# Altium PCB girassol3.PcbDoc
Units mil, origin at the board's own origin, x right, y up, seen from the top; angles counter-clockwise.
Board outline 3400 x 2150 mil, 2 copper layers (Top Layer, Bottom Layer); 43 components, 35 nets, 220 pads, 30 vias.
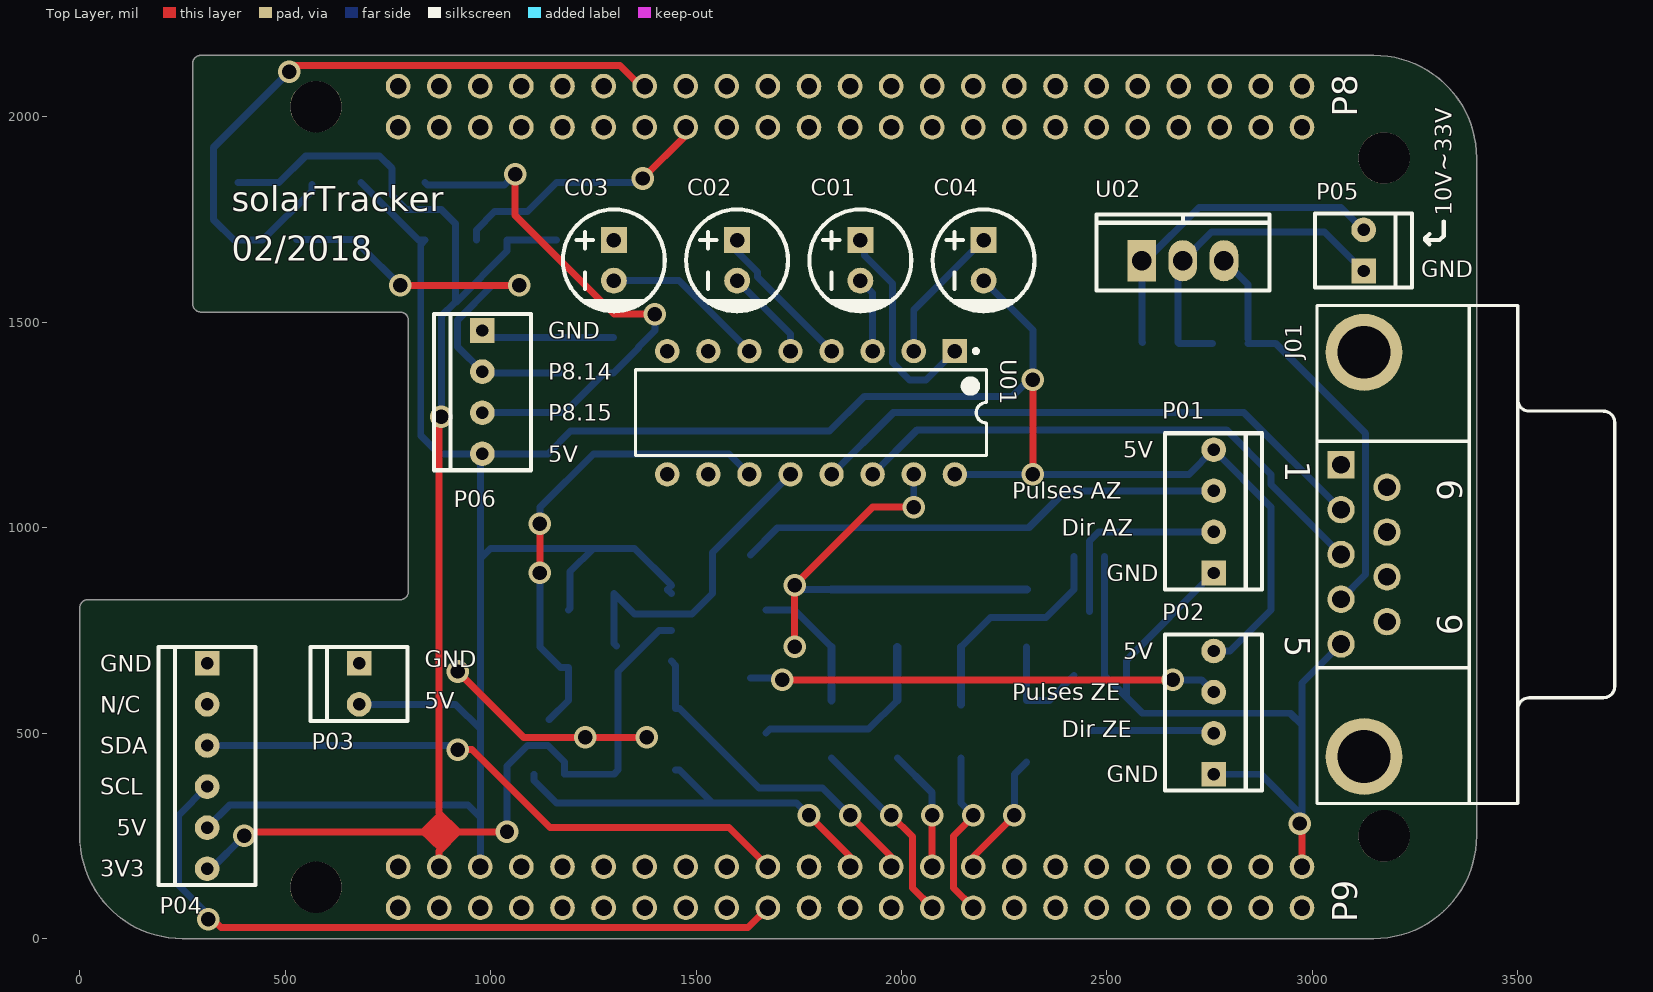
[diagram p0: Top Layer view]
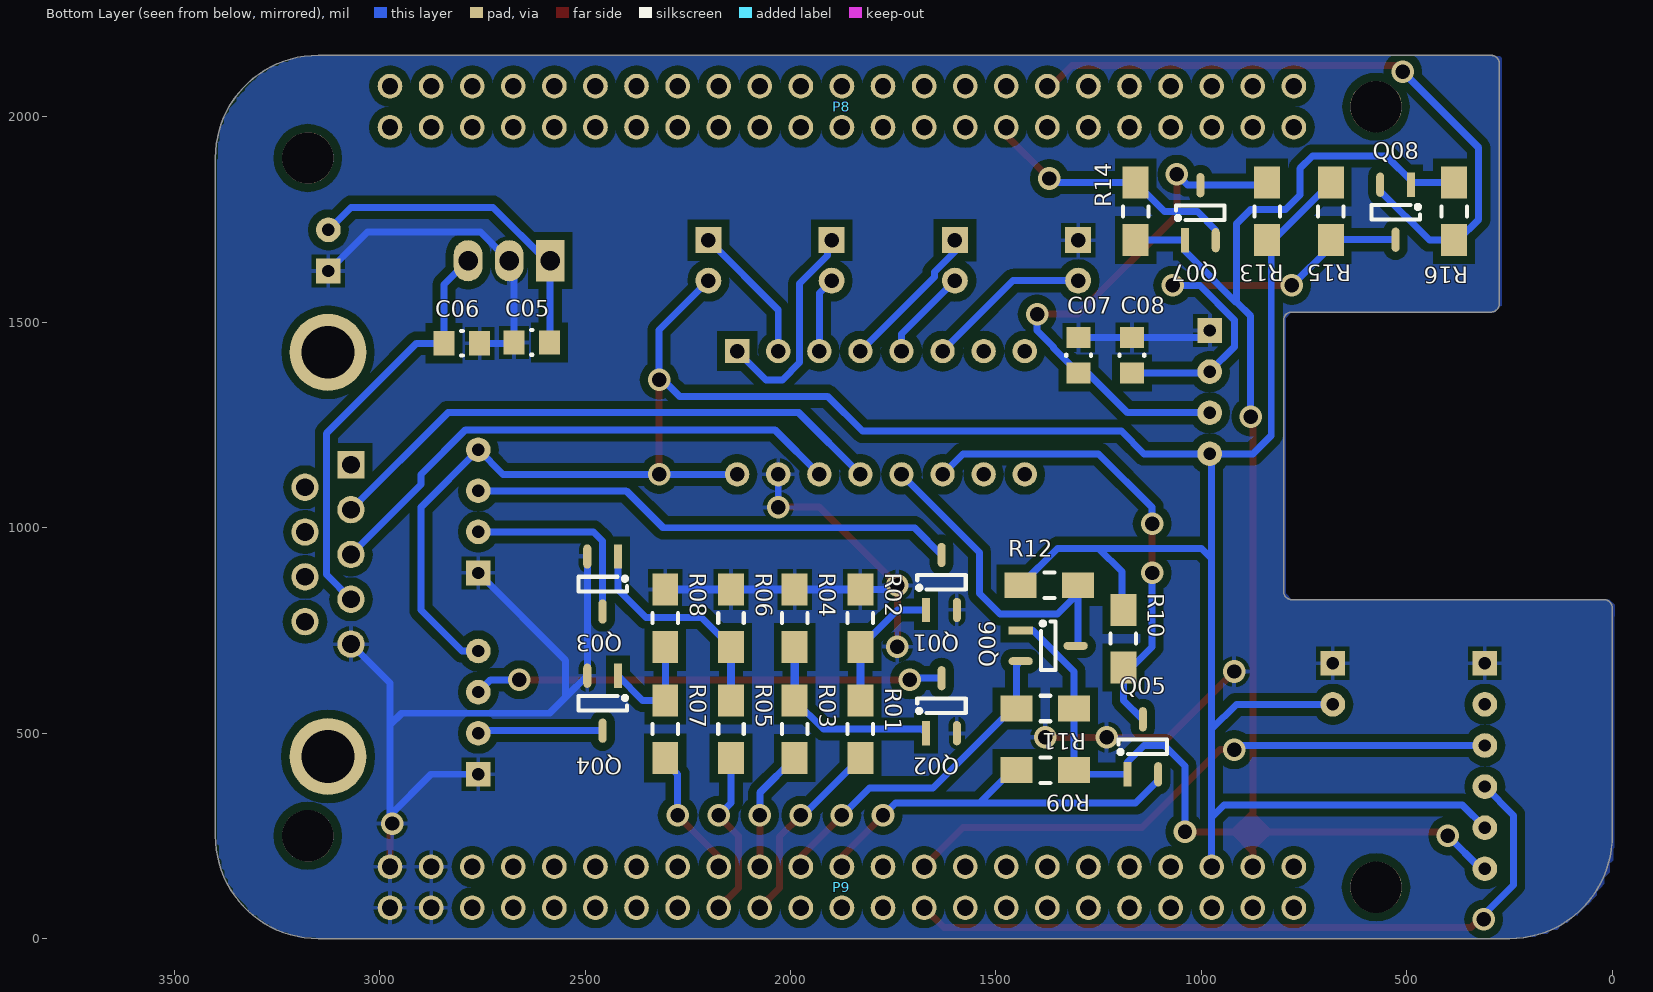
[diagram p1: Bottom Layer view, seen from below]

## Layer stack, top to bottom
Top Solder: solder mask 0.4, Solder Resist, Dk 3.5
Top Layer: signal copper 1.4
Dielectric1: dielectric 12.6, FR-4, Dk 4.8
Bottom Layer: signal copper 1.4
Bottom Solder: solder mask 0.4, Solder Resist, Dk 3.5

## Board outline
0,250 0,805 cw(c20,805) 20,825 780,825 ccw(c780,845) 800,845 800,1505 ccw(c780,1505) 780,1525 295,1525 cw(c295,1545) 275,1545 275,2130 cw(c295,2130) 295,2150 3150,2150 cw(c3150,1900) 3400,1900 3400,250 cw(c3150,250) 3150,0 250,0 cw(c250,250)

## Design rules (kind name [scope] priority, off if disabled: settings)
Clearance [All] p1: gap=10 ignorepadtopadclearanceinfootprint=FALSE except(0: Arc-Hole Track-Hole SMDPad-Hole THPad-Hole Via-Hole Fill-Hole Poly-Hole Region-Hole Text-Hole)
PolygonConnect [All] p1: connectstyle=Relief reliefconductorwidth=10 reliefentries=4 polygonreliefangle="90 Angle" airgapwidth=10
RoutingVias [All] p1: holewidth=28 width=50 viastyle="Through Hole" minholewidth=28 minwidth=50 maxholewidth=28 maxwidth=50
SolderMaskExpansion [All] p1: expansion=4
Width [All] p1: maxlimit=20 minlimit=15 preferedwidth=17
30 further rules are at their usual default settings.

## Components (designator, comment, footprint, x,y, rotation, side; value= is the part's Value field where it differs from the comment)
C01 "1uF" CP-RAD-6.3mm-15.0mm-2.5mm 1900,1700 r270 top
C02 "1uF" CP-RAD-6.3mm-15.0mm-2.5mm 1600,1700 r270 top
C03 "1uF" CP-RAD-6.3mm-15.0mm-2.5mm 1300,1700 r270 top
C04 "1uF" CP-RAD-6.3mm-15.0mm-2.5mm 2200,1700 r270 top
C05 "100nF" 0805SMD 2630,1450 r180 bottom
C06 "100nF" 0805SMD 2800,1450 r0 bottom
C07 "Cap" 0805SMD 1300,1420 r270 bottom
C08 "Cap" 0805SMD 1170,1420 r270 bottom
J01 "D Connector 9" DSUB1.385-2H9 3500,935 r270 top
P01 "Molex_kk-4" Molex_kk-4 2760,1090 r90 top
P02 "Molex_kk-4" Molex_kk-4 2760,600 r90 top
P03 "Molex_kk-2" Molex_kk-2 680,470 r270 top
P04 "Molex_kk-6" Molex_kk-6 310,470 r270 top
P05 "Molex_kk-2" Molex_kk-2 3125,1825 r90 top
P06 "Molex_kk-4" Molex_kk-4 980,1280 r270 top
P8 "BBB_P8" BBB_CAPE_HEADER 775,1975 r180 bottom locked
P9 "BBB_P9" BBB_CAPE_HEADER 775,75 r180 bottom locked
Q01 "2N7002" SOT-23/3 1670,800 r180 bottom
Q02 "2N7002" SOT-23/3 1670,500 r180 bottom
Q03 "2N7002" SOT-23/3 2420,930 r0 bottom
Q04 "2N7002" SOT-23/3 2420,640 r0 bottom
Q05 "2N7002" SOT-23/3 1180,400 r180 bottom
Q06 "2N7002" SOT-23/3 1440,750 r270 bottom
Q07 "2N7002" SOT-23/3 1040,1700 r180 bottom
Q08 "2N7002" SOT-23/3 490,1835 r0 bottom
R01 "10k" 1206SMD 1830,480 r90 bottom
R02 "10k" 1206SMD 1830,750 r90 bottom
R03 "10k" 1206SMD 1990,480 r90 bottom
R04 "10k" 1206SMD 1990,750 r90 bottom
R05 "10k" 1206SMD 2145,480 r90 bottom
R06 "10k" 1206SMD 2145,750 r90 bottom
R07 "10k" 1206SMD 2305,480 r90 bottom
R08 "10k" 1206SMD 2305,750 r90 bottom
R09 "10k" 1206SMD 1410,410 r180 bottom
R10 "10k" 1206SMD 1190,700 r90 bottom
R11 "10k" 1206SMD 1410,560 r180 bottom
R12 "10k" 1206SMD 1340,860 r0 bottom
R13 "10k" 1206SMD 840,1800 r270 bottom
R14 "10k" 1206SMD 1160,1800 r270 bottom
R15 "10k" 1206SMD 685,1740 r90 bottom
R16 "10k" 1206SMD 385,1740 r90 bottom
U01 "MAX232AEJE" JE16 1780,1280 r270 top
U02 "LM7815CT" TO-220/123 2585,1650 r0 top

## Footprints (in the part's own frame and the unit in brackets; to place one, negate y for a bottom-side part, rotate by r counter-clockwise, add the part's x,y. Pads: shape width x height; smd on the part's side, far side on the other; paste and mask are expansions set on the pad)
0805SMD [mm]
  rect 1.3x1.5 smd: 1(-1.1,0.025) 2(1.1,0.025)
  silkscreen extent -0.05,-0.74 0.05,0.79
1206SMD [mil]
  rect 78x63 smd: 1(-40,0) 2(100,0)
  silkscreen extent 18,-31 42,31
BBB_CAPE_HEADER [mil] "46-pin male header for BeagleBone Black P8,P9"
  round 60 hole 40: 1(0,0) 2(0,100) 3(-100,0) 4(-100,100) 5(-200,0) 6(-200,100) 7(-300,0) 8(-300,100) 9(-400,0) 10(-400,100) 11(-500,0) 12(-500,100) 13(-600,0) 14(-600,100) 15(-700,0) 16(-700,100) 17(-800,0) 18(-800,100) 19(-900,0) 20(-900,100) 21(-1000,0) 22(-1000,100) 23(-1100,0) 24(-1100,100) 25(-1200,0) 26(-1200,100) 27(-1300,0) 28(-1300,100) 29(-1400,0) 30(-1400,100) 31(-1500,0) 32(-1500,100) 33(-1600,0) 34(-1600,100) 35(-1700,0) 36(-1700,100) 37(-1800,0) 38(-1800,100) 39(-1900,0) 40(-1900,100) 41(-2000,0) 42(-2000,100) 43(-2100,0) 44(-2100,100) 45(-2200,0) 46(-2200,100)
  body extent -2246,-42 46,142, height 408
CP-RAD-6.3mm-15.0mm-2.5mm [mm] "Radial Capacitor; D 6.3mm; L 15.0mm; P 2.5mm"
  rect 1.6x1.6 hole 0.9: 1(0,0)
  round 1.6 hole 0.9: 2(2.5,0)
  silkscreen extent -1.9,-3.15 4.4,3.15
DSUB1.385-2H9 [mm] "Connector; D Subminiature; 9 Position; Right Angle; Pitch 1.385 mm"
  rect 1.69x1.69 hole 1.09: 1(-5.54,-10.92)
  round 1.69 hole 1.09: 2(-2.77,-10.92) 3(0,-10.92) 4(2.77,-10.92) 5(5.54,-10.92) 6(-4.155,-8.08) 7(-1.385,-8.08) 8(1.385,-8.08) 9(4.155,-8.08)
  round 4.76 hole 3.26: 10(-12.495,-9.5) 11(12.495,-9.5)
  silkscreen extent -15.4,-12.4 15.4,6
JE16 [mm] "DIP, 16-Leads, Row Spacing 7.62mm, Pitch 2.54mm, Body 20.37x6.73mm"
  rect 1.5x1.5 hole 0.9: 1(-3.81,8.89)
  round 1.5 hole 0.9: 2(-3.81,6.35) 3(-3.81,3.81) 4(-3.81,1.27) 5(-3.81,-1.27) 6(-3.81,-3.81) 7(-3.81,-6.35) 8(-3.81,-8.89) 9(3.81,-8.89) 10(3.81,-6.35) 11(3.81,-3.81) 12(3.81,-1.27) 13(3.81,1.27) 14(3.81,3.81) 15(3.81,6.35) 16(3.81,8.89)
  silkscreen extent -3.93,-10.85 2.65,10.85, body extent -3.6,-10.82 3.6,10.82, height 5.08
Molex_kk-2 [mil]
  rect 60x60 hole 30: 1(-200,0)
  round 60 hole 30: 2(-100,0)
  silkscreen extent -240,-118 -60,118
Molex_kk-4 [mil]
  rect 60x60 hole 30: 1(-200,0)
  round 60 hole 30: 2(-100,0) 3(0,0) 4(100,0)
  silkscreen extent -240,-118 140,118
Molex_kk-6 [mil]
  rect 60x60 hole 30: 1(-200,0)
  round 60 hole 30: 2(-100,0) 3(0,0) 4(100,0) 5(200,0) 6(300,0)
  silkscreen extent -240,-118 340,118
SOT-23/3 [mm] "Small Outline Transistor 3 leads"
  rect 0.5x1.5 smd: 1(0,0)
  oval 0.5x1.5 smd: 2(1.9,0) 3(0.95,3.4)
  silkscreen extent -0.56,1.25 2.45,2.16, body extent -0.56,0.5 2.44,3, height 1.08
TO-220/123 [mil] "TO, Thru-Hole, Vertical, Heatsink Mounted; 3 In-Line Leads; Pitch 2.54 mm"
  rect 70x100 hole 47.24: 1(0,0)
  oval 70x100 hole 47.24: 2(100,0) 3(200,0)
  silkscreen extent -111,-73 311,112, body extent -121,-59 321,126, height 832

## Part data
C01 C02 C03 C04: library part Capacitor-Electrolytic, "Electrolytic Capacitor"
C05 C06 C07 C08: library part Capacitor
J01: "Receptacle Assembly, 9 Position, Right Angle"
R01 R02 R03 R04 R05 R06 R07 R08 R09 R10 R11 R12 R13 R14 R15 R16: library part Resistor, "Resistor"
U01: "+5V Powered, Multi-Channel RS-232 Driver/Receiver"
U02: "Positive 15 V Regulator"

## Free pads (board coordinates)
  round 125 hole 125 unplated: NPTH(575,125) NPTH(575,2025) NPTH(3175,250) NPTH(3175,1900)

## Via types
v1: diameter 55, hole 35, Top Layer to Bottom Layer, 30 vias

## Nets (pads, with @x,y where several pads share a name; then routed paths per layer and width w, separated by ;. In a path a pad name is that pad's centre, name@x,y a point inside that pad or via, vN(x,y) a via of type N, cw(c..) or ccw(c..) an arc to the next point about the centre after c; other vN are vias at no path point)
3V3: P04.6 P9.4 Q05.1 Q06.1 Q07.1 Q08.1 R09.2 R11.2 R14.2 R16.2 | length 4286.6
  Top Layer w17: v1(400,250) 410,260 920,260 ; P9.4 875,213 921,259 920,260 ; v1(880,1270) 874,1264 874,306 920,260 ; v1(1040,260) 920,260
  Bottom Layer w17: P04.6 320,170 v1(400,250) ; R16.2 485,1840 550,1905 730,1905 760,1875 760,1810 795,1775 880,1775 915,1740 915,1550 ; v1(880,1270) 880,1515 915,1550 ; v1(1040,260) 1040,420 1090,470 1140,470 1180,430 Q05.1 1300,400 R09.2 R11.2 1310,650 1410,750 Q06.1 ; R14.2 Q07.1 1040,1673.48 916.52,1550 915,1550
5V: C04.2 P01.4 P02.4 P03.2 P04.5 P06.4 P9.6 R10.2 R12.2 R13.2 R15.2 U01.16 | length 6799.6
  Top Layer w17: v1(2320,1130) v1(2320,1360)
  Bottom Layer w17: P04.5 365,325 945,325 975,295 ; P03.2 915,570 975,510 ; R15.2 825,1700 R13.2 830,1690 830,1225 875,1180 P06.4 ; P9.6 975,295 ; R10.2 1193.5,803.5 1193.5,893.5 1250,950 ; R12.2@1430,850 R12.2@1440,840 ; R12.2 1350,950 1250,950 ; U01.16 v1(2320,1130) 2700,1130 P01.4 2900,1050 2900,800 2800,700 P02.4 ; C04.2 2320,1481.57 v1(2320,1360) ; v1@2310,1360 2270,1320 1910,1320 1825,1235 1195,1235 1140,1180 P06.4 ; 975,295 975,510 ; 975,510 975,925 ; 975,925 975,1175 P06.4 ; 975,925 1000,950 1250,950
10V-33V: C05.2 P05.2 U02.1 | length 816.3
  Bottom Layer w17: C05.2 2585,1452.69 U02.1 2594.34,1650 2724.34,1780 3070,1780 P05.2
15V: C06.2 J01.4 U02.3 | length 1021.4
  Bottom Layer w17: U02.3 2843.31,1591.69 C06.2@2843.31,1459 ; C06.2 2911,1449 3130,1230 3130,885.87 J01.4
GND: C03.1 C05.1 C06.1 C07.1 C08.1 J01.5 P01.1 P02.1 P03.1 P04.1 P05.1 P06.1 P9.43 P9.44 P9.45 P9.46 Q01.2 Q02.2 Q03.2 Q04.2 R02.2 R04.2 R06.2 R08.2 U01.15 U02.2 | length 4868.8
  Top Layer w17: v1(920,650) 1080,490 v1(1230,490) v1(1380,490) ; v1(1740,710) v1(1740,860) 1930,1050 v1(2030,1050) ; v1(2970,280) 2975,275 P9.46
  Bottom Layer w17: P06.1 996.69,1463.31 C08.1 C07.1 ; v1(1740,860) 1750,850 R02.2 ; v1(2030,1050) U01.15 ; Q03.2 Q04.2 2547.4,587.4 ; C06.1 2675.31,1449 C05.1 2673.31,1638.31 U02.2 2755,1720 3030,1720 P05.1 ; P02.1 2875,400 v1@2975,300 ; P01.1 2547.4,677.4 2547.4,587.4 ; v1(2970,280) 2975,285 v1@2975,300 ; J01.5 2975,621.81 2975,520 ; 2547.4,587.4 2586.3,548.5 2946.5,548.5 2975,520 ; v1@2975,300 2975,520
  Bottom Layer w20: R02.2 R04.2 R06.2 R08.2
NetC01_1: C01.1 U01.1 | length 548.7
  Bottom Layer w17: C01.1 1910,1710 1910,1662.28 1978.03,1594.25 1978.03,1401.97 2020,1360 2060,1360 U01.1
NetC01_2: C01.2 U01.3 | length 184
  Bottom Layer w17: C01.2 1930,1571.57 U01.3
NetC02_1: C02.1 U01.4 | length 365.3
  Bottom Layer w17: C02.1 1600,1672.28 1650,1622.28 1650,1610 U01.4
NetC02_2: C02.2 U01.5 | length 225.4
  Bottom Layer w17: C02.2 1730,1471.57 U01.5
NetC03_2: C03.2 U01.6 | length 401.1
  Bottom Layer w17: C03.2 1458.43,1601.57 U01.6
NetC04_1: C04.1 U01.2 | length 340.4
  Bottom Layer w17: U01.2 2030,1530 C04.1
NetC07_2: C07.2 P06.3 Q07.3 R13.1 | length 1317
  Top Layer w17: v1(1060,1860) 1060,1760 1300,1520 v1(1400,1520)
  Bottom Layer w17: R13.1 846.14,1833.86 Q07.3 1033.86,1833.86 v1(1060,1860) ; P06.3 1180,1280 1276.69,1376.69 C07.2 1360,1437.69 1360,1440 1400,1480 v1(1400,1520)
NetC08_2: C08.2 P06.2 Q08.3 R15.1 | length 1123.5
  Top Layer w17: v1(780,1590) v1(1070,1590)
  Bottom Layer w17: Q08.3 683.86,1701.14 R15.1 685,1685 v1(780,1590) ; v1(1070,1590) 1003.84,1590 920,1506.16 920,1440 P06.2 983.31,1376.69 C08.2
NetJ01_2: J01.2 U01.13 | length 1399.9
  Bottom Layer w17: U01.13 1980,1280 2834.13,1280 J01.2
NetJ01_3: J01.3 U01.14 | length 1325.3
  Bottom Layer w17: U01.14 2038.5,1238.5 2791.5,1238.5 2900,1130 2900,1105.08 J01.3
NetP01_2: P01.2 Q03.3 | length 483.2
  Bottom Layer w17: Q03.3 2457.4,967.4 2480,990 P01.2
NetP01_3: P01.3 Q01.3 | length 1192.1
  Bottom Layer w17: Q01.3 1698.74,1000 2310,1000 2400,1090 P01.3
NetP02_2: P02.2 Q04.3 | length 305.1
  Bottom Layer w17: Q04.3 2753.86,506.14 P02.2
NetP02_3: P02.3 Q02.3 | length 1141.4
  Top Layer w17: v1(1710,630) v1(2660,630)
  Bottom Layer w17: Q02.3 1706.14,633.86 v1(1710,630) ; v1(2660,630) 2730,630 P02.3
NetP04_3: P04.3 P9.20 | length 1487.2
  Top Layer w17: v1(920,460) 955,460 1145,270 1580,270 P9.20
  Bottom Layer w17: P04.3 910,470 v1(920,460)
NetP04_4: P04.4 P9.19 | length 1772.8
  Top Layer w17: v1(313,47) 323,47 343.5,26.5 1626.5,26.5 P9.19
  Bottom Layer w17: P04.4 240,300 240,130 313,57 v1(313,47)
NetP8_14: P8.14 Q08.2 R16.1 | length 1653.9
  Top Layer w17: v1(510,2110) 525,2125 1315,2125 1365,2075 P8.14
  Bottom Layer w17: v1(510,2110) 325,1925 325,1750 375,1700 R16.1 445,1700 564.8,1819.8 Q08.2
NetP8_15: P8.15 Q07.2 R14.1 | length 650.2
  Top Layer w17: v1(1370,1850) 1475,1955 P8.15
  Bottom Layer w17: Q07.2 965.2,1725.2 1010,1770 1090,1770 R14.1 1360,1840 v1(1370,1850)
NetP9_24: P9.24 Q05.2 R09.1 | length 1009.7
  Top Layer w17: v1(1775,300) 1875,200 P9.24
  Bottom Layer w17: Q05.2 1105.2,384.8 1160,330 1540,330 ; R09.1 1460,410 1540,330 ; v1(1775,300) 1745,330 1540,330
NetP9_26: P9.26 Q06.2 R11.1 | length 818.5
  Top Layer w17: v1(1875,300) 1975,200 P9.26
  Bottom Layer w17: Q06.2 1450,665.2 R11.1 1460,560 1653,367 1808,367 v1(1875,300)
NetP9_27: P9.27 R01.1 | length 469.4
  Top Layer w17: v1(1975,300) 2026.5,248.5 2026.5,123.5 P9.27
  Bottom Layer w17: R01.1 1970,300 v1(1975,300)
NetP9_28: P9.28 R03.1 | length 300.2
  Top Layer w17: P9.28 v1(2075,300)
  Bottom Layer w17: R03.1 2075,355 v1(2075,300)
NetP9_29: P9.29 R05.1 | length 417.6
  Top Layer w17: P9.29 2126.5,123.5 2126.5,250 2175,298.5 v1(2175,300)
  Bottom Layer w17: R05.1 2145,330 v1(2175,300)
NetP9_30: P9.30 R07.1 | length 308.8
  Top Layer w17: P9.30 2175,200 v1(2275,300)
  Bottom Layer w17: v1(2275,300) 2275,400 R07.1@2305,430
NetQ01_1: Q01.1 R01.2 R02.1 | length 327.3
  Bottom Layer w17: Q01.1 1740,800 R02.1
  Bottom Layer w20: R01.2 R02.1
NetQ02_1: Q02.1 R03.2 R04.1 | length 483.1
  Bottom Layer w17: Q02.1 1680,510 1920,510 R03.2
  Bottom Layer w20: R03.2 R04.1
NetQ03_1: Q03.1 R05.2 R06.1 | length 553
  Bottom Layer w17: R06.1 2217,782 2352,782 2420,850 Q03.1
  Bottom Layer w20: R05.2@2145,570 R06.1
NetQ04_1: Q04.1 R07.2 R08.1 | length 269.9
  Bottom Layer w17: R08.1 R07.2 2360,580 Q04.1
NetQ05_3: Q05.3 R10.1 U01.11 | length 1161.8
  Top Layer w17: v1(1120,890) v1(1120,1010)
  Bottom Layer w17: v1(1120,890) 1120,710 1170,660 R10.1 1190,580 1143.86,533.86 Q05.3 ; v1(1120,1010) 1120,1050 1250,1180 1580,1180 U01.11
NetQ06_3: Q06.3 R12.1 U01.12 | length 780.1
  Bottom Layer w17: Q06.3 1300,718.74 1300,840 1350,790 1490,790 1540,840 1540,940 U01.12
pads on no net: J01.1 J01.6 J01.7 J01.8 J01.9 J01.10 J01.11 P04.2 P8.1 P8.2 P8.3 P8.4 P8.5 P8.6 P8.7 P8.8 P8.9 P8.10 P8.11 P8.12 P8.13 P8.16 P8.17 P8.18 P8.19 P8.20 P8.21 P8.22 P8.23 P8.24 P8.25 P8.26 P8.27 P8.28 P8.29 P8.30 P8.31 P8.32 P8.33 P8.34 P8.35 P8.36 P8.37 P8.38 P8.39 P8.40 P8.41 P8.42 P8.43 P8.44 P8.45 P8.46 P9.1 P9.2 P9.3 P9.5 P9.7 P9.8 P9.9 P9.10 P9.11 P9.12 P9.13 P9.14 P9.15 P9.16 P9.17 P9.18 P9.21 P9.22 P9.23 P9.25 P9.31 P9.32 P9.33 P9.34 P9.35 P9.36 P9.37 P9.38 P9.39 P9.40 P9.41 P9.42 U01.7 U01.8 U01.9 U01.10

## Polygon pours and split planes (outlines as drawn)
GND on Bottom Layer "Bottom Layer-No Net" (solid, pour order 2): 174 vertices, not listed, extent -6.04,0.04 3394.96,2150.04

## Other copper
Top Layer:
  region net 3V3: 875,213 875,215 920,260 874,306 871,306 825,260

## Silkscreen, mask and mechanical layers (free items; w line width, h text height)
Top Overlay:
  lines w10: 3285,1690 3275,1700 ; 3285,1715 3275,1705 3275,1700 ; 3320,1745 3320,1710 3310,1700 3275,1700
  text "solarTracker" at 370,1770 h60
  text "10V~33V" at 3340,1760 h40 r90
  text "02/2018" at 370,1650 h60
  text "GND" at 3265,1610 h40
  text "GND" at 1140,1460 h40
  text "P8.14" at 1140,1360 h40
  text "P8.15" at 1140,1260 h40
  text "5V" at 2540,1170 h40
  text "5V" at 1140,1160 h40
  text "Pulses AZ" at 2270,1070 h40
  text "Dir AZ" at 2390,980 h40
  text "GND" at 2500,870 h40
  text "5V" at 2540,680 h40
  text "GND" at 840,660 h40
  text "GND" at 50,650 h40
  text "Pulses ZE" at 2270,580 h40
  text "5V" at 840,560 h40
  text "N/C" at 50,550 h40
  text "Dir ZE" at 2390,490 h40
  text "SDA" at 50,450 h40
  text "GND" at 2500,380 h40
  text "SCL" at 50,350 h40
  text "5V" at 90,250 h40
  text "3V3" at 50,150 h40
Mechanical 1:
  the board outline again, w10

## Text inside footprints (layer, text, board x,y; h text height)
J01: Top Overlay "1" at 2934.06,1162.95 h60 r270; Top Overlay "5" at 2934.06,736.57 h60 r270; Top Overlay "9" at 3304.13,791.1 h60 r270; Top Overlay "6" at 3304.13,1118.27 h60 r270